# Altium PCB HSB-Version1.PcbDoc
Units mm, origin at the board's own origin, x right, y up, seen from the top; angles counter-clockwise.
Board outline 33.25 x 31.79 mm, 2 copper layers (Top Layer, Bottom Layer); 22 components, 28 nets, 91 pads, 20 vias.
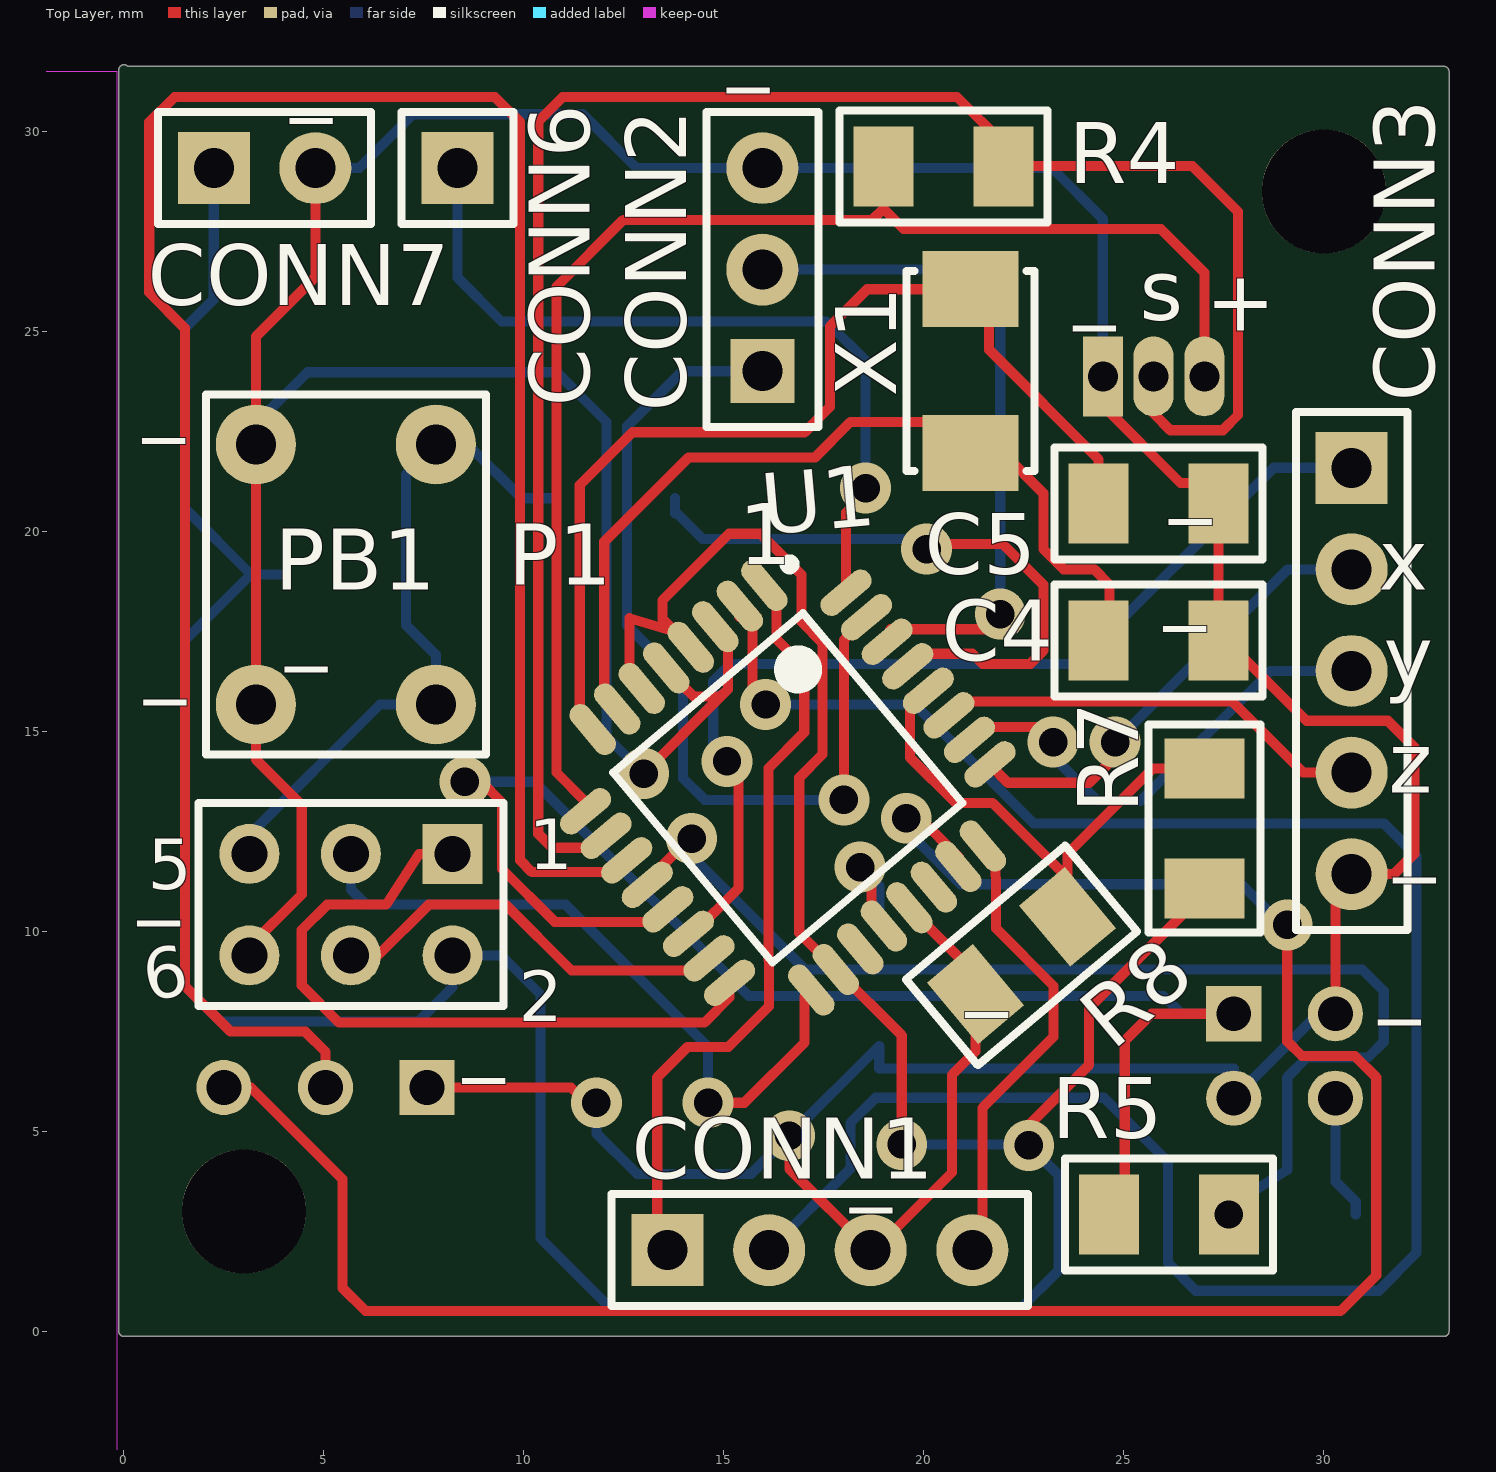
[diagram p0: Top Layer view]
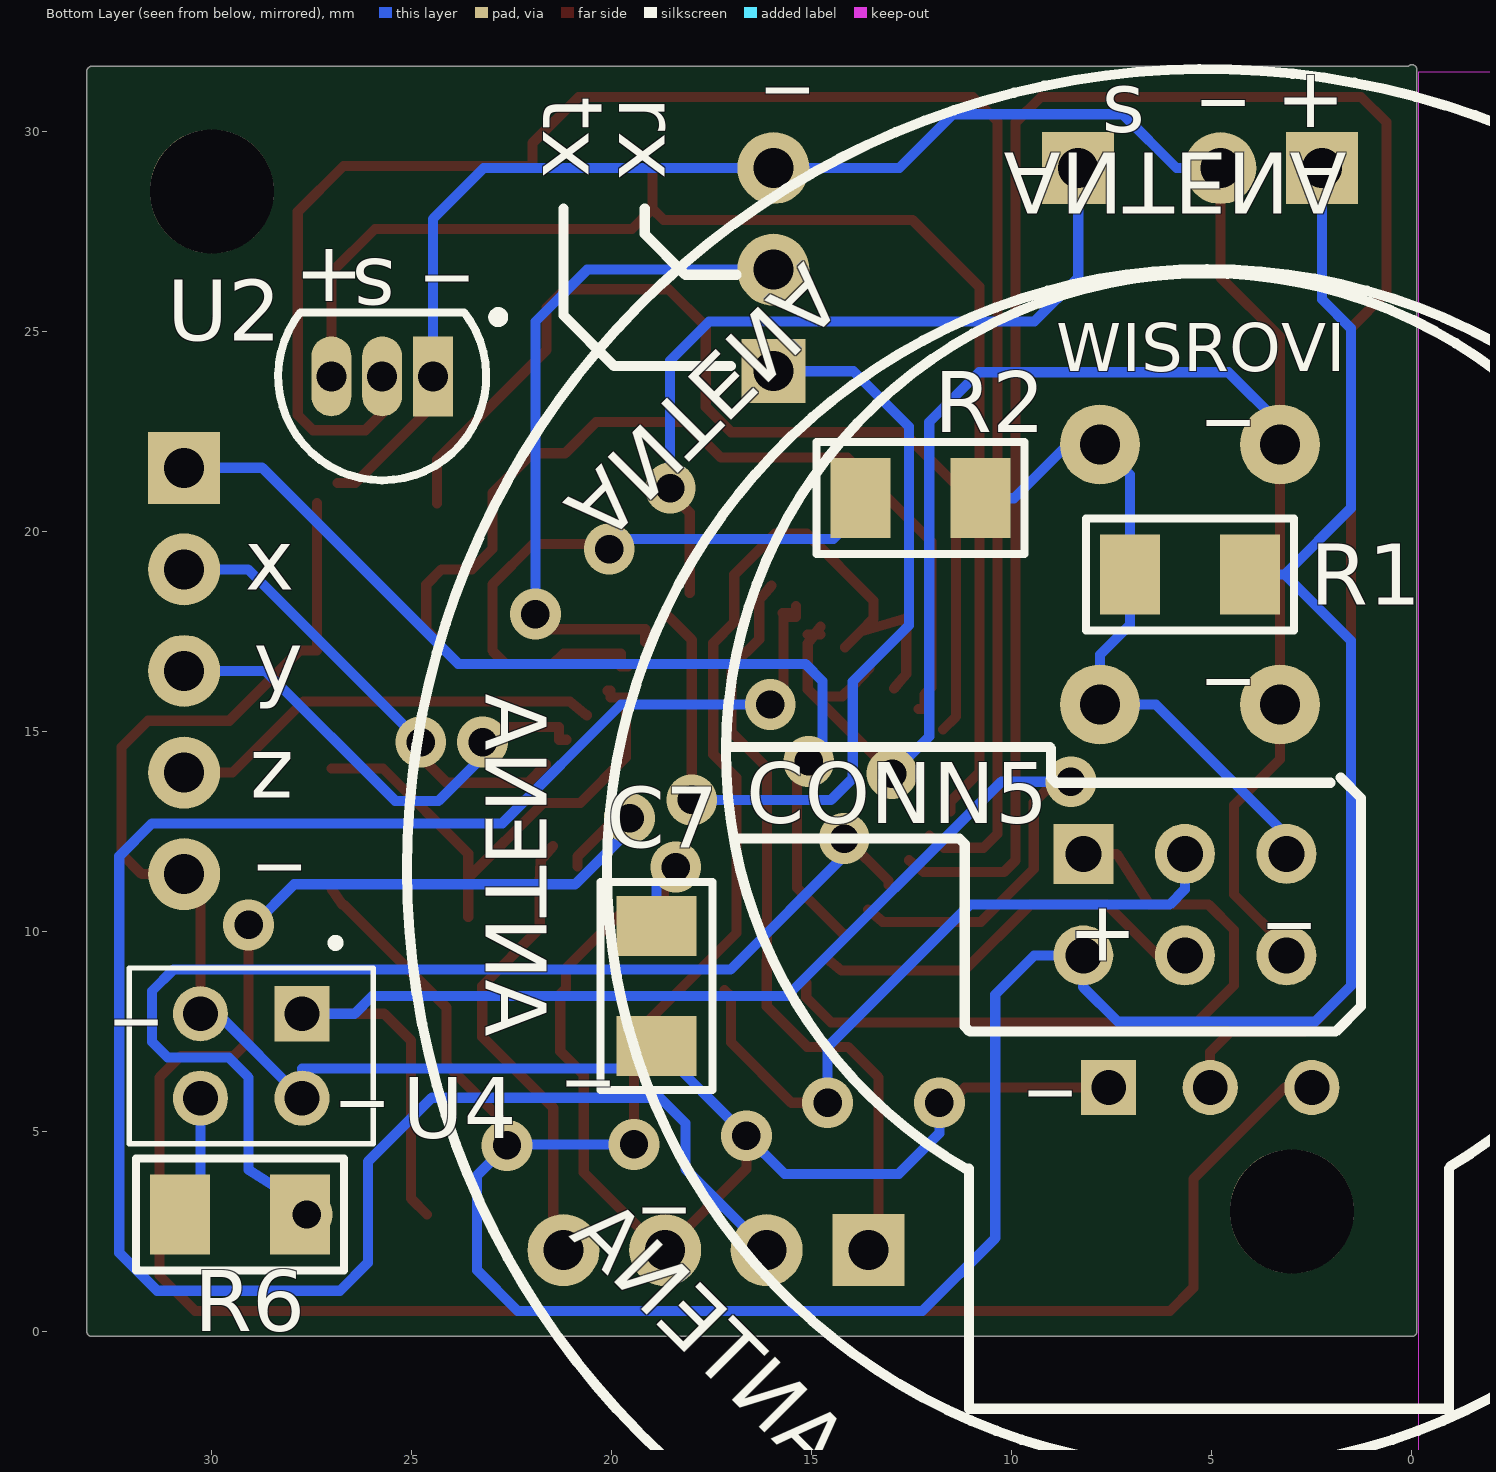
[diagram p1: Bottom Layer view, seen from below]
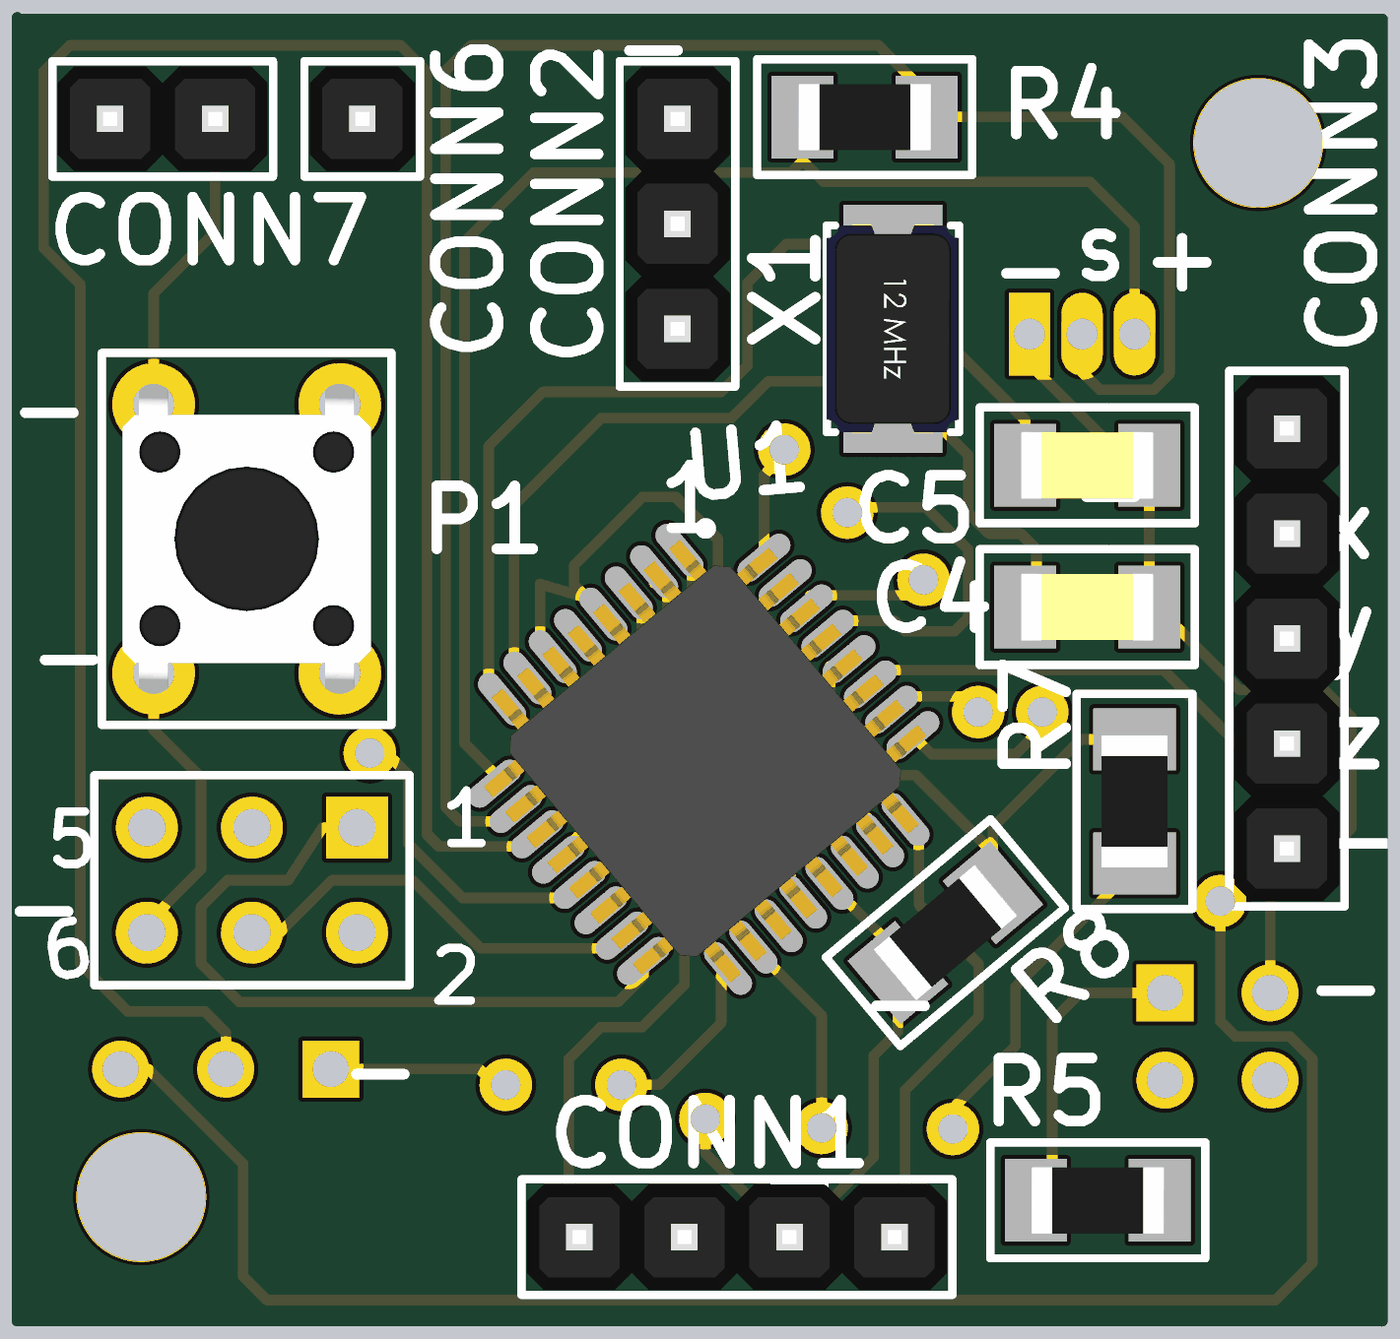
[diagram p2: 3D render of the assembled board from above, using the file's embedded part models]
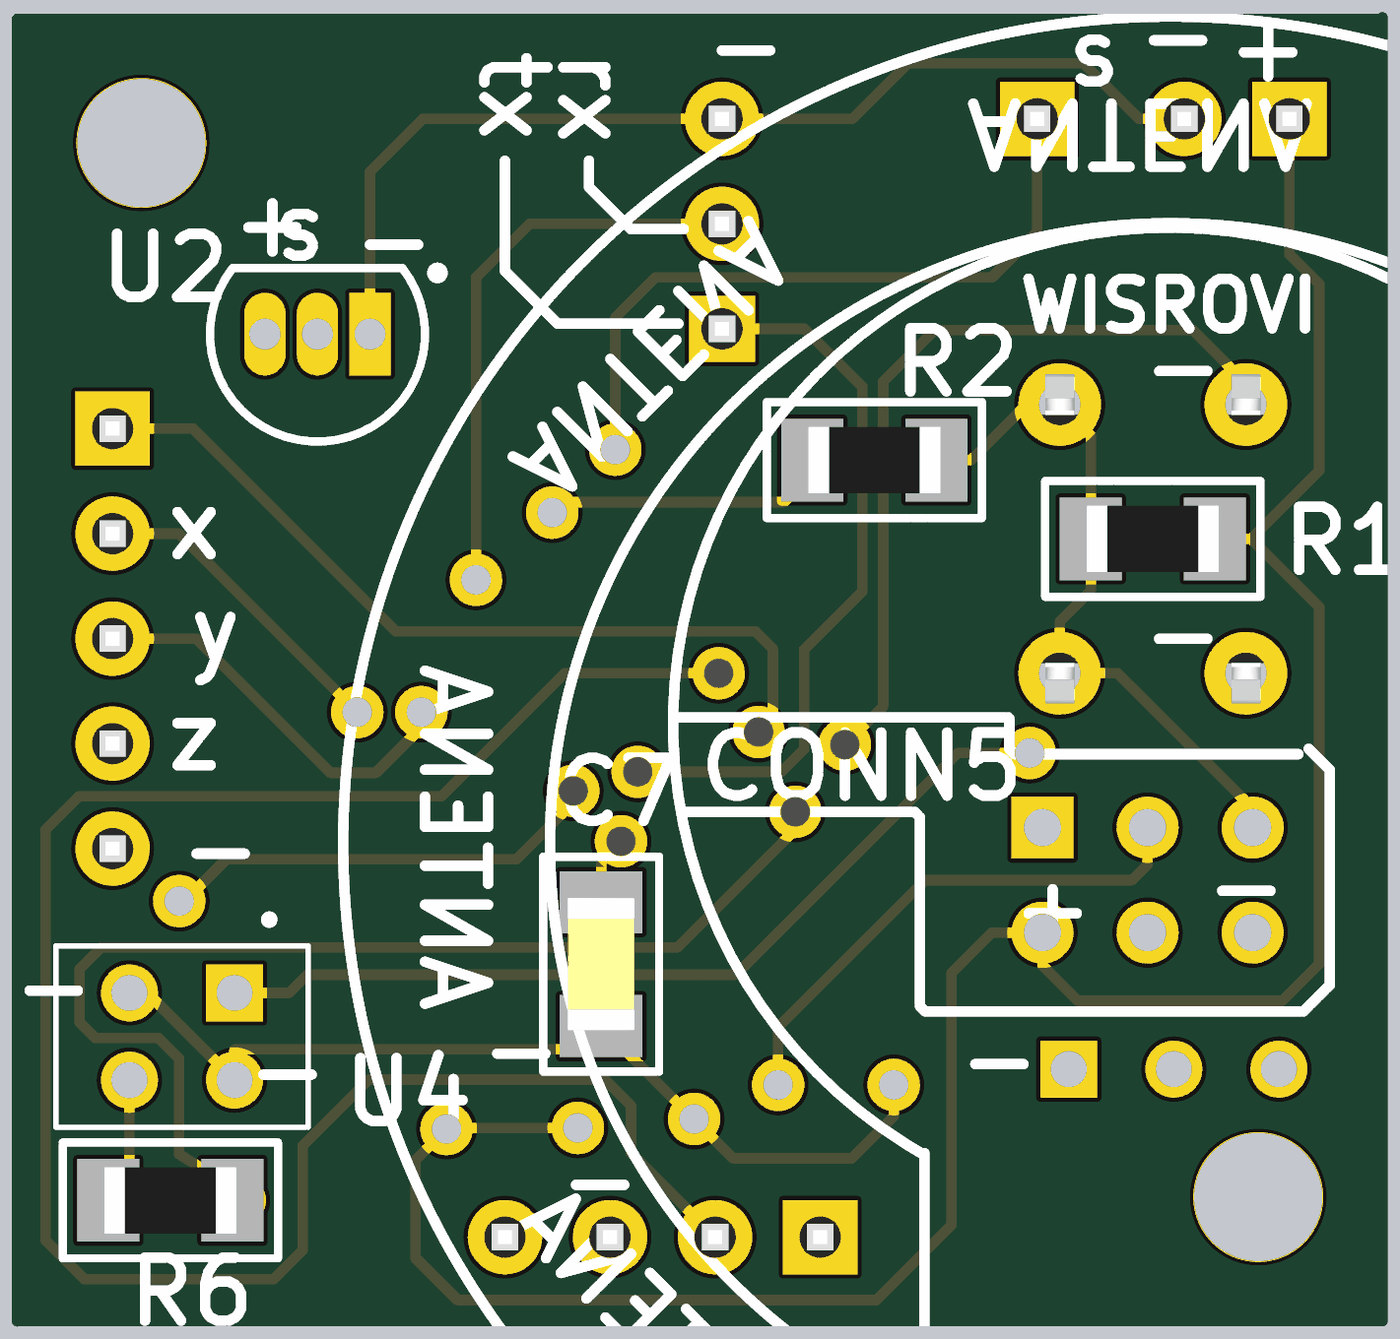
[diagram p3: 3D render of the assembled board from below, using the file's embedded part models]

## Layer stack, top to bottom
Top Solder: solder mask 0.0102, Solder Resist, Dk 3.5
Top Layer: signal copper 0.0356
Dielectric1: dielectric 0.32, FR-4, Dk 4.8
Bottom Layer: signal copper 0.0356
Bottom Solder: solder mask 0.0102, Solder Resist, Dk 3.5

## Board outline
-0.127,0 ccw(c0,0) 0,-0.127 32.905,-0.127 ccw(c32.905,0) 32.952,-0.118 ccw(c33,0) 33.127,0 33.127,31.5 ccw(c33,31.5) 32.99,31.627 ccw(c32.98,31.5) 32.98,31.627 0.091,31.627 ccw(c0,31.538) -0.127,31.538

## Design rules (kind name [scope] priority, off if disabled: settings)
Clearance [All] p1: gap=0.2 ignorepadtopadclearanceinfootprint=FALSE except(0: Arc-Hole Track-Hole SMDPad-Hole THPad-Hole Via-Hole Fill-Hole Poly-Hole Region-Hole Text-Hole)
PolygonConnect [All] p1: connectstyle=Relief reliefconductorwidth=0.254 reliefentries=4 polygonreliefangle="90 Angle" airgapwidth=0.254
RoomDefinition Temperatura [InComponentClass('Temperatura')] p1: confinementstyle=ConfineIn formatcopy=TRUE lockcomponents=FALSE outline -177.506,-147.955 -126.706,-147.955 -126.706,-122.555 -177.506,-122.555
RoomDefinition SensorCaida [InComponentClass('SensorCaida')] p2: confinementstyle=ConfineIn formatcopy=TRUE lockcomponents=FALSE outline -177.506,-147.955 -126.706,-147.955 -126.706,-122.555 -177.506,-122.555
RoomDefinition Proximidad [InComponentClass('Proximidad')] p3: confinementstyle=ConfineIn formatcopy=TRUE lockcomponents=FALSE outline -177.506,-147.955 -126.706,-147.955 -126.706,-122.555 -177.506,-122.555
RoomDefinition PPM [InComponentClass('PPM')] p4: confinementstyle=ConfineIn formatcopy=TRUE lockcomponents=FALSE outline -177.506,-147.955 -126.706,-147.955 -126.706,-122.555 -177.506,-122.555
RoomDefinition CargaInalambrica [InComponentClass('CargaInalambrica')] p5: confinementstyle=ConfineIn formatcopy=TRUE lockcomponents=FALSE outline -177.506,-147.955 -126.706,-147.955 -126.706,-122.555 -177.506,-122.555
RoomDefinition BLE-HM10 [InComponentClass('BLE-HM10')] p6: confinementstyle=ConfineIn formatcopy=TRUE lockcomponents=FALSE outline -177.506,-147.955 -126.706,-147.955 -126.706,-122.555 -177.506,-122.555
RoomDefinition Atmega328P [InComponentClass('Atmega328P')] p7: confinementstyle=ConfineIn formatcopy=TRUE lockcomponents=FALSE outline -177.506,-147.955 -126.706,-147.955 -126.706,-122.555 -177.506,-122.555
RoutingVias [All] p1: holewidth=0.711 width=1.27 viastyle="Through Hole" minholewidth=0.711 minwidth=1.27 maxholewidth=0.711 maxwidth=1.27
SilkToSilkClearance [All] p1: silktosilkclearance=0.05
SilkToSolderMaskClearance [IsPad] p1: minsilkscreentomaskgap=0.125 clearancetoexposedcopper=TRUE
SolderMaskExpansion [All] p1: expansion=0.102
Width [All] p1: maxlimit=0.254 minlimit=0.254 preferedwidth=0.254
28 further rules are at their usual default settings.

## Classes and differential pairs
component class CargaInalambrica: CONN7
component class Proximidad: R5 R6 U4
component class BLE-HM10: CONN1
component class Temperatura: R4 U2
component class Atmega328P: C4 C5 C7 CONN2 CONN6 P1 PB1 R1 R2 R7 R8 U1 X1
component class SensorCaida: CONN3
component class PPM: CONN5

## Components (designator, comment, footprint, x,y, rotation, side; value= is the part's Value field where it differs from the comment)
C4 "C1" C1206-1.25 25.868,17.272 r180 top value=22pF
C5 "C2" C1206-1.25 25.868,20.701 r180 top value=22pF
C7 "C2" C1206-1.25 18.883,8.636 r90 bottom value=0.1uF
CONN1 "Connector" "1x4x2.54 Pin Header TH V" 17.399,2.032 r0 top
CONN2 "Connector" "1x3x2.54 Pin Header TH V" 15.962,26.543 r90 top
CONN3 "Connector" "1x5x2.54 Pin Header TH V" 30.694,16.51 r270 top
CONN5 "Connector" SEN0203 -2.199,0.762 r90 bottom locked
CONN6 "Connector" "1x1x2.54 Pin Header TH V" 8.342,29.083 r90 top
CONN7 "Connector" "1x2x2.54 Pin Header TH V" 3.516,29.083 r0 top
P1 "Header 3X2" HDR2X3 8.215,11.938 r180 top
PB1 "Push Button" "Tack Switch 6x6 1mm TH" 5.548,18.923 r270 top
R1 "R" R1206-0.55 5.548,18.923 r0 bottom value=1K
R2 "R" R1206-0.55 12.279,20.828 r180 bottom value=330
R4 "R" R1206-0.55 20.488,29.125 r180 top value=4.7K
R5 "R" R1206-0.55 26.122,2.921 r0 top value=10K
R6 "R" R1206-0.55 29.297,2.921 r180 bottom value=100
R7 "R" R1206-0.55 27.011,12.573 r270 top value=2K
R8 "R" R1206-0.55 22.439,9.398 r40 top value=680
U1 "ATMEGA328P-AU" TQFP80P900X900X120-32N 16.597,13.589 r310 top
U2 "DS18B20" Z03A 25.741,23.876 r90 bottom
U4 "QRD1114" *ONS_QRD1114 28.916,6.985 r270 bottom
X1 "XTAL" 2-SMD 21.169,24.003 r270 top value=16MHz

## Footprints (in the part's own frame and the unit in brackets; to place one, negate y for a bottom-side part, rotate by r counter-clockwise, add the part's x,y. Pads: shape width x height; smd on the part's side, far side on the other; paste and mask are expansions set on the pad)
"1x1x2.54 Pin Header TH V" [mm] "1x1x2.54 Pin Header TH V"
  rect 1.8x1.8 hole 1: 1(0,0)
  silkscreen extent -1.4,-1.4 1.4,1.4, body extent -1.27,-1.27 1.27,1.27, height 8.55
"1x2x2.54 Pin Header TH V" [mm] "1x2x2.54 Pin Header TH V"
  rect 1.8x1.8 hole 1: 1(-1.27,0)
  round 1.8 hole 1: 2(1.27,0)
  silkscreen extent -2.67,-1.4 2.67,1.4, body extent -2.54,-1.27 2.54,1.27, height 8.55
"1x3x2.54 Pin Header TH V" [mm] "1x3x2.54 Pin Header TH V"
  rect 1.6x1.6 hole 1: 1(-2.54,0)
  round 1.8 hole 1: 2(0,0) 3(2.54,0)
  silkscreen extent -3.94,-1.4 3.94,1.4, body extent -3.81,-1.27 3.81,1.27, height 8.55
"1x4x2.54 Pin Header TH V" [mm] "1x4x2.54 Pin Header TH V"
  rect 1.8x1.8 hole 1: 1(-3.81,0)
  round 1.8 hole 1: 2(-1.27,0) 3(1.27,0) 4(3.81,0)
  silkscreen extent -5.21,-1.4 5.21,1.4, body extent -5.08,-1.27 5.08,1.27, height 8.55
"1x5x2.54 Pin Header TH V" [mm] "1x5x2.54 Pin Header TH V"
  rect 1.8x1.8 hole 1: 1(-5.08,0)
  round 1.8 hole 1: 2(-2.54,0) 3(0,0) 4(2.54,0) 5(5.08,0)
  silkscreen extent -6.48,-1.4 6.48,1.4, body extent -6.35,-1.27 6.35,1.27, height 8.55
2-SMD [mm] "2-SMD"
  rect 1.9x2.4 smd: 1(-2.05,0) 2(2.05,0)
  silkscreen extent -2.5,-1.6 2.5,1.6, body extent -2.51,-1.6 2.51,1.6, height 1.05
*ONS_QRD1114 [mm]
  rect 1.378x1.378 hole 0.87: 1(-0.955,1.17)
  round 1.378 hole 0.87: 2(-0.955,-1.37) 3(1.155,-1.37) 4(1.155,1.17)
  silkscreen extent -2.83,-3.15 2.29,2.95
C1206-1.25 [mm] "Capacitor Chip 1206 Height 1.25mm"
  rect 1.5x2 smd: 1(-1.5,0) 2(1.5,0)
  silkscreen extent -2.6,-1.4 2.6,1.4, body extent -1.6,-0.81 1.6,0.81, height 1.26
HDR2X3 [mm] "Connector; Header; 3x2 Position"
  rect 1.5x1.5 hole 0.9: 1(0,0)
  round 1.5 hole 0.9: 2(0,2.54) 3(2.54,0) 4(2.54,2.54) 5(5.08,0) 6(5.08,2.54)
  silkscreen extent -1.27,-1.27 6.35,3.81
R1206-0.55 [mm] "Resistor Chip 1206 Height 0.55mm"
  rect 1.5x2 smd: 1(-1.5,0) 2(1.5,0)
  silkscreen extent -2.6,-1.4 2.6,1.4, body extent -1.6,-0.8 1.6,0.8, height 0.56
SEN0203 [mil] "Sensor PPM"
  rect 54.25x54.25 hole 34.25: 1(210,385)
  round 54.25 hole 34.25: 2(210,285) 3(210,185)
  silkscreen extent -106,-183 1012,762
"Tack Switch 6x6 1mm TH" [mm] "Tack Switch 6x6mm, 1mm button height TH"
  round 2 hole 1: 1(-3.25,2.25) 1(3.25,2.25) 2(-3.25,-2.25) 2(3.25,-2.25)
  silkscreen extent -4.5,-3.5 4.5,3.5, body extent -3.98,-3 3.98,3, height 4.41
TQFP80P900X900X120-32N [mm] "TQFP, 32-Leads, Body 7.00x7.00mm, Pitch 0.80mm, IPC Medium Density"
  oval 1.5x0.55 smd: 1(-4.25,2.8) 2(-4.25,2) 3(-4.25,1.2) 4(-4.25,0.4) 5(-4.25,-0.4) 6(-4.25,-1.2) 7(-4.25,-2) 8(-4.25,-2.8) 17(4.25,-2.8) 18(4.25,-2) 19(4.25,-1.2) 20(4.191,-0.381) 21(4.25,0.4) 22(4.25,1.2) 23(4.25,2) 24(4.25,2.8)
  oval 0.55x1.5 smd: 9(-2.8,-4.25) 10(-2,-4.25) 11(-1.2,-4.25) 12(-0.4,-4.25) 13(0.4,-4.25) 14(1.2,-4.25) 15(2,-4.25) 16(2.8,-4.25) 25(2.8,4.25) 26(2,4.25) 27(1.2,4.25) 28(0.4,4.25) 29(-0.4,4.25) 30(-1.2,4.25) 31(-2,4.25) 32(-2.8,4.25)
  silkscreen extent -4.37,-3.1 3.1,3.75, body extent -4.45,-4.5 4.55,4.5, height 1.6
Z03A [mm] "TO, Flat Index; 3 In-Line, Axial Leads; Body Dia. 5mm; Leads 0.55 x 0.50 mm (max)"
  rect 2x1 hole 0.75: 1(0,-1.27)
  oval 2x1 hole 0.75: 2(0,0) 3(0,1.27)
  silkscreen extent -2.6,-3.02 1.6,2.6, body extent -2.6,-2.61 1.6,2.61, height 5.2

## Part data
C4 C5 C7: library part C, "Capacitor, generic"
CONN1: library part "Header 1x4", "Header"
CONN2: library part "Header 1x3", "Rx / Tx"
CONN3: library part "Header 1x5"
CONN5: library part "Header 1x3", "Con PPM"
CONN6: library part "Header 1x1", "Sen Batery"
CONN7: library part "Header 1x2", "Con Batery"
P1: "Header, 3-Pin, Dual row", LatestRevisionDate=17-Jul-2002, LatestRevisionNote="Re-released for DXP Platform.", Publisher="Altium Limited"
R1 R2 R4 R5 R6 R7 R8: "Resistor, generic"
U1: "Microchip Technology ATMEGA328P-AN, 8bit AVR Microcontroller, 20MHz, 32 kB Flash, 32-Pin TQFP", Company=Gueni, Created By="Mohamed Gueni", Datasheet URL=https://docs-emea.rs-online.com/webdocs/15b8/0900766b815b8e7b.pdf, Date="20 October 2018", RS Stock No=131-0271
U2: library part LM35CAZ/NOPB, "Precision Centigrade Temperature Sensor, 3-pin TO-92, Pb-Free", Manufacturer="National Semiconductor", PackageTopMarking=NSXYTT*LM35*CAZ, PowerWise=N, Supplier Part Number 1=LM35CAZ-ND, Code_JEDEC=TO-226-AA, ComponentLink1Description="LM35 Datasheet", ComponentLink1URL=http://www.national.com/ds/LM/LM35.pdf, ComponentLink2Description="LM35 Web Page", ComponentLink2URL=http://www.national.com/pf/LM/LM35.html, ComponentLink3Description="Z03A Package Page", ComponentLink3URL=http://www.national.com/packaging/folders/z03a.html, CompType="Temp Sensor IC", DatasheetVersion=Nov-2000, PackageDescription="TO-92, Molded, 3 Lead", PackageReference=Z03A, PackageVersion="revG, Sep-2000", PartNumber=LM35CAZ/NOPB, PinCount=3, Published=1-Mar-2010, Publisher="Altium Limited", RoHS=Y, Supplier 1=Digi-Key, Supplier 2=Farnell, Supplier Part Number 2=1469232
U4: "Sensor óptico reflectante 0.050 _1.27 mm_ radial - 4 conductores", Package="Radial-4 ON Semiconductor", Digi-Key_Part_Number=QRD1114-ND, Digi-Key_Purchase_URL=https://www.digikey.com/product-detail/en/on-semiconductor/QRD1114/QRD1114-ND/187536?utm_source=snapeda&utm_medium=aggregator&utm_campaign=symbol, MF="ON Semiconductor", MP=QRD1114, SnapEDA_Link=https://www.snapeda.com/parts/QRD1114/ON%20Semiconductor/view-part/2706462/?ref=snap
X1: "Crystal, Generic"

## Free pads (board coordinates)
  round 3.1 hole 3.1: 0(3,3) 1(30,28.5)

## Via types
v1: diameter 1.27, hole 0.711, Top Layer to Bottom Layer, 20 vias

## Nets (pads, with @x,y where several pads share a name; then routed paths per layer and width w, separated by ;. In a path a pad name is that pad's centre, name@x,y a point inside that pad or via, vN(x,y) a via of type N, cw(c..) or ccw(c..) an arc to the next point about the centre after c; other vN are vias at no path point)
3.3V: CONN7.1 P1.2 R1.1 R7.2 U1.4 U1.6 U1.18 | length 93.8
  Top Layer w0.254: U1.6 12.792,16.256 12.638,16.437 12.638,17.831 U1.4@13.783,17.49 ; U1.4 U1.4@13.783,17.49 ; v1(19.446,4.674) 19.446,7.399 U1.18 16.883,9.961 16.883,13.843 17.464,14.424 17.464,17.207 16.939,17.732 16.939,18.915 15.915,19.939 15.128,19.939 13.462,18.273 13.462,17.811 U1.4@13.783,17.49 ; v1(22.621,4.648) 22.621,5.156 24.13,6.666 24.13,8.092 26.706,10.668 26.745,10.668 R7.2
  Bottom Layer w0.254: CONN7.1 2.246,25.803 1.524,25.081 1.524,20.574 3.175,18.923 R1.1 ; 3.175,18.923 1.524,17.272 1.524,8.636 2.413,7.747 7.355,7.747 8.215,8.607 P1.2 9.438,9.398 10.414,8.422 10.414,2.331 12.237,0.508 22.352,0.508 23.368,1.524 23.368,3.901 v1(22.621,4.648) 22.595,4.674 v1(19.446,4.674)
A0: CONN5.3 U1.23 | length 56.6
  Top Layer w0.254: CONN5.3 3.175,6.096 5.461,3.81 5.461,1.092 6.045,0.508 30.418,0.508 31.307,1.397 31.307,6.35 30.774,6.883 29.453,6.883 29.083,7.254 v1(29.083,10.16) ; v1(19.558,12.827) 19.903,12.827 20.861,11.869 U1.23
  Bottom Layer w0.254: v1(19.558,12.827) 19.34,12.827 19.304,12.791 20.919,11.176 27.94,11.176 28.956,10.16 v1(29.083,10.16)
A1: CONN1.4 U1.24 | length 11.7
  Top Layer w0.254: CONN1.4 21.463,2.286 21.463,5.588 23.241,7.366 23.241,8.636 21.803,10.074 21.803,11.229 21.779,11.769 U1.24
A2: CONN3.2 U1.25 | length 11.7
  Top Layer w0.254: U1.25 21.652,14.162 22.098,13.716 24.13,13.716 24.78,14.366 v1(24.78,14.732)
  Bottom Layer w0.254: v1(24.78,14.732) 29.098,19.05 CONN3.2
A3: CONN3.3 U1.26 | length 12.2
  Top Layer w0.254: U1.26 21.325,14.789 21.325,15.113 22.849,15.113 v1(23.23,14.732)
  Bottom Layer w0.254: v1(23.23,14.732) 23.23,14.362 24.33,13.262 25.415,13.262 28.663,16.51 CONN3.3
A4: CONN3.4 U1.27 | length 10.9
  Top Layer w0.254: U1.27 21.05,15.748 27.707,15.748 29.485,13.97 CONN3.4
A5: R7.1 R8.2 U1.28 | length 13.2
  Top Layer w0.254: U1.28 20.03,16.014 20.03,15.85 19.649,15.85 19.649,14.351 20.792,13.208 21.717,13.208 R8.2@23.588,11.337 ; R8.2 R8.2@23.588,11.337 ; R7.1 25.721,14.073 23.588,11.94 R8.2@23.588,11.337
AREF: C7.2 U1.20 | length 3.5
  Top Layer w0.254: v1(18.404,11.608) 18.694,11.608 18.694,10.497 U1.20
  Bottom Layer w0.254: v1(18.404,11.608) 18.883,11.129 C7.2
C_BAT: CONN6.1 U1.32 | length 20.4
  Top Layer w0.254: U1.32 18.053,20.466 v1@18.542,20.955 ; v1@18.288,20.644 18.542,20.898 v1@18.542,20.955 ; v1(18.542,21.082) v1@18.542,20.955 ; v1@18.669,21.082 v1@18.542,20.955
  Bottom Layer w0.254: CONN6.1 8.342,26.344 9.438,25.248 17.566,25.248 18.542,24.272 v1(18.542,21.082)
D0: CONN2.2 U1.30 | length 17.1
  Top Layer w0.254: U1.30 19.166,17.24 19.166,17.551 21.528,17.551 v1(21.909,17.932)
  Bottom Layer w0.254: CONN2.2 20.614,26.543 21.909,25.248 v1(21.909,17.932)
D1: CONN2.1 U1.31 | length 22.4
  Top Layer w0.254: v1(18.001,13.287) 18.001,17.286 U1.31
  Bottom Layer w0.254: CONN2.1 13.959,24.003 12.573,22.617 12.573,17.653 13.977,16.249 13.977,13.828 14.518,13.287 v1(18.001,13.287)
D3: CONN1.1 U1.1 | length 19.2
  Top Layer w0.254: CONN1.1 13.335,2.286 13.335,6.35 14.097,7.112 15.113,7.112 16.128,8.127 16.128,9.276 16.118,9.286 16.118,14.086 17.007,14.975 17.007,16.612 16.315,17.303 16.315,18.281 U1.1
D4: CONN1.2 U1.2 | length 53.7
  Top Layer w0.254: U1.2 U1.2@15.397,17.958 ; U1.2@15.737,17.958 U1.2@15.397,17.958 ; v1(16.042,15.672) 15.712,16.002 15.712,17.856 15.397,17.856 U1.2@15.397,17.958
  Bottom Layer w0.254: v1(16.042,15.672) 19.769,15.672 22.741,12.7 31.496,12.7 32.316,11.88 32.316,1.963 31.369,1.016 26.797,1.016 26.1,1.713 26.1,4.242 24.5,5.842 18.796,5.842 18.161,5.207 18.161,4.064 CONN1.2 CONN1.2@16.129,1.694
D5: R4.2 U1.9 U2.3 | length 34.7
  Top Layer w0.254: U1.9 11.542,13.241 10.813,13.97 10.813,26.115 12.486,27.788 18.709,27.788 18.988,28.067 ; R4.2 18.988,28.067 ; U2.3 27.011,26.471 25.923,27.559 19.496,27.559 18.988,28.067
D6: R4.1 U1.10 U2.2 | length 47.5
  Top Layer w0.254: U1.10 11.692,12.09 10.708,12.09 10.359,12.439 10.359,30.247 10.973,30.861 20.828,30.861 21.988,29.701 R4.1@21.988,29.134 ; R4.1 R4.1@21.988,29.134 ; U2.2 25.741,22.951 26.162,22.53 27.472,22.53 27.853,22.911 27.853,27.991 26.71,29.134 R4.1@21.988,29.134
D7: CONN5.2 U1.11 | length 58.2
  Top Layer w0.254: CONN5.2 5.044,6.096 5.044,6.985 4.536,7.493 2.667,7.493 1.524,8.636 1.524,25.081 0.635,25.97 0.635,30.226 1.27,30.861 9.271,30.861 9.905,30.227 9.905,11.777 10.2,11.482 12.206,11.482 U1.11
D8: R5.2 R6.2 U1.12 | length 29.2
  Top Layer w0.254: U1.12 13.084,11.266 14.137,12.319 v1(14.19,12.319)
  Bottom Layer w0.254: v1(14.19,12.319) 14.19,12.046 14.112,11.967 17.036,9.042 30.963,9.042 31.496,8.509 31.496,7.239 31.103,6.846 29.579,6.846 29.083,6.35 29.083,4.04 27.791,3.219 27.763,2.964 R6.2@27.709,2.921 ; v1(27.622,2.921) R6.2@27.709,2.921 ; R6.2 R6.2@27.709,2.921
D9: R5.1 U1.13 U4.1 | length 36.8
  Top Layer w0.254: v1(8.524,13.741) 8.93,13.741 9.451,13.22 9.451,11.557 10.772,10.236 13.235,10.236 13.235,10.245 U1.13 ; R5.1 25.019,3.318 25.019,7.265 25.694,7.94 U4.1
  Bottom Layer w0.254: v1(8.524,13.741) 10.262,13.741 15.621,8.382 25.989,8.382 26.431,7.94 U4.1
D10: CONN3.1 U1.14 | length 25.3
  Top Layer w0.254: U1.14 14.22,9.938 15.367,11.085 15.367,13.959 v1(15.077,14.249)
  Bottom Layer w0.254: v1(15.077,14.249) 14.732,14.594 14.732,16.256 15.164,16.688 23.84,16.688 28.742,21.59 CONN3.1
D11: P1.4 U1.15 | length 10.3
  Top Layer w0.254: P1.4 6.35,9.398 7.62,10.668 9.542,10.668 11.191,9.02 14.263,9.02 U1.15
D12: P1.1 U1.16 | length 17.8
  Top Layer w0.254: P1.1 7.381,11.938 6.554,10.668 5.08,10.668 4.445,10.033 4.445,8.651 5.374,7.722 14.518,7.722 15.141,8.345 U1.16
D13: P1.3 U1.17 | length 17.3
  Top Layer w0.254: v1(14.605,5.715) 15.512,5.715 17.018,7.221 17.018,8.368 U1.17
  Bottom Layer w0.254: P1.3 5.675,11.049 6.056,10.668 11.049,10.668 14.629,7.088 14.605,7.064 v1(14.605,5.715)
GND: C4.1 C5.1 C7.1 CONN1.3 CONN2.3 CONN3.5 CONN5.1 CONN7.2 P1.6 PB1.2 R8.1 U1.3 U1.5 U1.21 U2.1 U4.2 U4.4 | length 135.9
  Top Layer w0.254: P1.6 3.135,9.612 4.445,10.922 4.445,13.153 3.298,14.3 3.298,15.673 3.298,22.173 3.298,24.867 4.786,26.355 CONN7.2 ; CONN5.1 11.176,6.096 v1@11.557,5.715 ; v1(12.994,13.945) 14.924,15.875 ; U1.5 13.985,16.129 14.239,15.875 14.924,15.875 ; U1.3@14.784,17.424 U1.3@14.929,17.424 ; U1.3 U1.3@14.929,17.424 ; U1.3@15.102,17.424 U1.3@14.929,17.424 ; v1(16.637,4.89) 16.637,4.064 CONN1.3 18.763,2.032 20.701,3.97 20.701,6.412 21.29,7.001 R8.1 21.147,8.576 21.147,9.078 U1.21 U1.21@19.635,10.414 ; U2.1 24.471,23.154 26.416,21.209 C5.1@26.86,21.209 ; C5.1 C4.1 27.368,17.018 27.813,17.018 29.566,15.265 31.598,15.265 32.258,14.605 32.258,11.938 31.75,11.43 CONN3.5 30.694,11.136 30.286,10.728 U4.2 ; 14.924,15.875 15.102,16.053 15.102,17.196 U1.3@14.929,17.424
  Bottom Layer w0.254: PB1.2@3.298,22.173 3.298,22.687 4.589,23.977 10.821,23.977 12.065,22.733 12.065,14.874 v1(12.994,13.945) ; CONN7.2 5.882,29.083 7.228,30.429 11.47,30.429 12.816,29.083 CONN2.3 23.201,29.083 24.471,27.813 U2.1 ; v1(11.811,5.715) 11.811,4.953 12.827,3.937 15.684,3.937 v1(16.637,4.89) C7.1 18.883,6.572 27.746,6.572 U4.4 29.856,7.94 U4.2
NET-X1: C4.2 U1.7 X1.2 | length 22.3
  Top Layer w0.254: U1.7 12.181,15.559 12.181,15.926 12.008,16.099 12.008,19.74 14.112,21.844 17.272,21.844 18.161,22.733 20.389,22.733 X1.2 21.989,21.953 22.987,20.955 22.987,19.558 23.495,19.05 24.257,19.05 24.638,18.669 24.638,17.542 C4.2
NET-X2: C5.2 U1.8 X1.1 | length 25.9
  Top Layer w0.254: U1.8 11.396,15.369 11.396,21.161 12.715,22.479 17.018,22.479 17.653,23.114 17.653,25.124 18.582,26.053 X1.1 21.63,25.592 21.63,24.536 24.368,21.798 C5.2
PINRESET: R2.1 U1.29 | length 16
  Top Layer w0.254: U1.29 19.776,16.627 19.776,16.942 21.209,16.942 21.463,16.688 22.657,16.688 22.987,17.018 22.987,18.669 21.971,19.685 20.193,19.685 v1(20.066,19.558)
  Bottom Layer w0.254: R2.1 13.779,20.447 13.83,20.447 14.465,19.812 19.812,19.812 v1(20.066,19.558)
RES1K: R6.1 U4.3 | length 3.1
  Bottom Layer w0.254: U4.3 30.286,3.75 30.797,3.239 R6.1
RST_PROG: P1.5 PB1.1 R1.2 R2.2 | length 17.1
  Bottom Layer w0.254: P1.5 3.135,12.406 6.402,15.673 7.798,15.673 7.798,16.916 7.048,17.666 R1.2 7.048,21.423 7.798,22.173 8.6,22.173 9.945,20.828 R2.2
pads on no net: U1.19 U1.22

## Keep-outs
Keep-Out Layer:
  rectangle: -26.202,-3.302 -0.167,31.496

## Silkscreen, mask and mechanical layers (free items; w line width, h text height)
Top Overlay:
  text "_" at 16.129,30.607 h1.52 r180
  text "_" at 5.207,29.845 h1.52 r180
  text "_" at 23.749,25.476 h1.52
  text "s" at 25.4,25.273 h1.52
  text "+" at 27.051,25.019 h1.52
  text "_" at 1.524,21.844 h1.52 r180
  text "_" at 27.178,19.812 h1.52 r180
  text "1" at 15.367,19.177 h1.52
  text "x" at 31.369,18.542 h1.52
  text "_" at 27.051,17.145 h1.52 r180
  text "_" at 0.508,16.129 h1.52
  text "_" at 5.08,16.129 h1.52 r180
  text "y" at 31.496,16.129 h1.52
  text "z" at 31.623,13.462 h1.52
  text "_" at 31.75,11.684 h1.52
  text "_" at 1.397,9.779 h1.52 r180
  text "_" at 31.369,8.128 h1.52
  text "_" at 22.098,7.493 h1.52 r180
  text "_" at 9.525,5.842 h1.52 r180
  text "_" at 18.161,3.429 h1.52
Bottom Overlay:
  circle w0.254: c5.12,11.557 r20
  circle w0.254: c5.12,11.557 r15
  lines w0.254: 1.778,13.843 1.27,13.335 1.27,8.128 1.905,7.493 11.049,7.493 11.176,7.62 11.176,12.186 11.309,12.319 16.891,12.319 ; 2.032,13.716 8.89,13.716 9.017,13.843 9.017,14.574 9.048,14.605 17.145,14.605 ; 16.891,26.416 18.161,26.416 19.177,27.432 19.177,28.067 ; 17.018,24.13 19.939,24.13 21.209,25.4 21.209,28.067
  text "_" at 4.191,31.115 h1.52
  text "rx" at 19.812,30.861 h1.52 r90
  text "tx" at 21.717,30.861 h1.52 r90
  text "_" at 16.129,30.607 h1.52 r180
  text "+" at 1.651,30.099 h1.52
  text "s" at 7.747,29.972 h1.52
  text "ANTENA" at 10.2,29.464 h1.52 r180
  text "+" at 27.94,27.051 h1.52 r180
  text "s" at 25.4,26.797 h1.52 r180
  text "_" at 24.638,25.908 h1.52 r180
  text "WISROVI" at 8.89,24.003 h1.2
  text "_" at 4.064,23.114 h1.52
  text "ANTENA" at 21.249,20.701 h1.52 r135
  text "x" at 27.94,18.542 h1.52
  text "_" at 4.064,16.637 h1.52
  text "y" at 28.956,16.002 h1.52
  text "z" at 27.94,14.478 h1.52 r180
  text "_" at 28.829,11.176 h1.52 r180
  text "_" at 2.54,10.541 h1.52
  text "+" at 6.858,9.271 h1.52
  text "_" at 31.369,8.128 h1.52
  text "ANTENA" at 23.154,7.366 h1.52 r90
  text "_" at 20.066,6.604 h1.52
  text "_" at 8.509,6.35 h1.52
  text "_" at 25.716,6.096 h1.52
  text "_" at 18.161,3.429 h1.52
  text "ANTENA" at 15.026,-3.683 h1.52 r45
Drill Guide:
  lines w0.254: 0,31.538 0,0 25.505,0 32.905,0 ; 0.005,31.5 32.98,31.5 ; 33,0 33,31.5

## Text inside footprints (layer, text, board x,y; h text height)
P1: Top Overlay "6" at 0.595,8.255 h1.27 r10; Top Overlay "5" at 0.595,11.049 h1.27; Top Overlay "2" at 9.866,7.747 h1.27; Top Overlay "1" at 10.12,11.557 h1.27